# EAGLE board encoder_board (EAGLE 9.5.1)
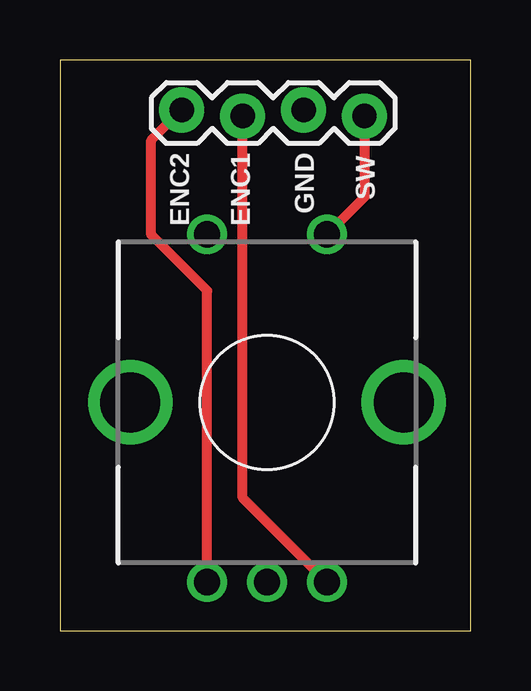
[diagram p0: board, top side]
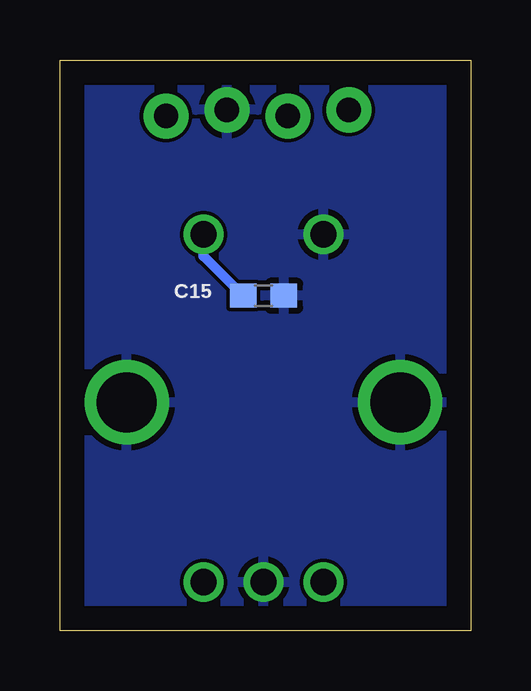
[diagram p1: board, bottom side, seen from below]

Size 17.12 x 23.8 mm. Coordinates in mm from the lower left corner, seen from the top.
Outline: 0,0 17.12,0 17.12,23.8 0,23.8 0,0
Copper layers (1*16): Top 0.035mm / dielectric 1.5mm / Bottom 0.035mm
Design rules "default": minimum track width 6mil, minimum drill 0.35mm, track to track 6mil, track to pad 6mil, pad to pad 6mil, via to via 6mil, smd to smd 6mil, copper to edge 40mil, drill to drill 6mil, minimum pad ring 10mil, minimum via ring 8mil, stop-mask expansion 4mil, vias tented up to drill 0mil, thermal gap 10mil

## Footprints (pad centres in the part's own frame; a part is rotated, then mirrored left to right if it is on the bottom)
C0603 = smd 1.1 x 1: 1 -0.85,0; 2 0.85,0
PEC11R-4XXXK-SXXXX = drill 1.1 pad 1.65: A -2.5,-7.5; B 2.5,-7.5; C 0,-7.5; SW1 -2.5,7; SW2 2.5,7 | drill 2.5: SH1 -5.7,0; SH2 5.7,0
1X04_LOCK = drill 1.016 pad 1.88: 1 0,0.127; 2 2.54,-0.127; 3 5.08,0.127; 4 7.62,-0.127

## Placement (x,y rotation side)
C15  470n  [C0603]  8.64,13.97 180 bottom
ENC-R  PEC11R  [PEC11R-4XXXK-SXXXX]  8.64,9.53 0 top
J1  [1X04_LOCK]  5.08,21.59 0 top

## Library data of the parts
C15 = resistor
ENC-R = PEC11R-4215K-S0024; ALLIED_NUMBER: 70407906; ALLIED_PRICE-STOCK: https://www.alliedelec.com/bourns-pec11r-4215k-s0024/70407906/; ARROW_PART_NUMBER: PEC11R-4215K-S0024; ARROW_PRICE-STOCK: http://uk.rs-online.com/web/p/products/1674651; DESCRIPTION: Incremental encoder 24 detents 24 pulses Bourns 24 Pulse Incremental Mechanical Rotary Encoder with a 6 mm Flat Shaft (Not Indexed), Through Hole; HEIGHT: mm; MANUFACTURER_NAME: Bourns; MANUFACTURER_PART_NUMBER: PEC11R-4215K-S0024; RS_PART_NUMBER: 1674651; RS_PRICE-STOCK: http://uk.rs-online.com/web/p/products/1674651
J1 = SparkFun-Connectors; PROD_ID: CONN-09696

## Nets
ENC_R1: ENC-R.B J1.2
ENC_R2: ENC-R.A J1.1
GND: C15.1 ENC-R.C ENC-R.SH1 ENC-R.SH2 ENC-R.SW1 J1.3
SW_R: C15.2 ENC-R.SW2 J1.4

## Tracks (layer width: path | path; a pad name or v marks a point on that pad's centre or on a via)
ENC_R1
  Top 0.406: ENC-R.B 7.62,5.54 J1.2
ENC_R2
  Top 0.406: ENC-R.A 6.14,14.18 3.81,16.51 3.81,20.45 J1.1
GND
  pour Bottom: 0,0 17.78,0 17.78,24.13 0,24.13
SW_R
  Top 0.406: J1.4 12.7,18.09 ENC-R.SW2
  Bottom 0.406: C15.2 11.14,15.62 ENC-R.SW2

## Text on the board
tPlace: ENC2 | ENC1 | GND | SW